# Altium PCB PCB1.PcbDoc
Units mil, origin at the board's own origin, x right, y up, seen from the top; angles counter-clockwise.
Board outline 3500 x 2000 mil, 2 copper layers (Top Layer, Bottom Layer), stack 61.756 mil thick; 34 components, 21 nets, 87 pads, 17 vias.
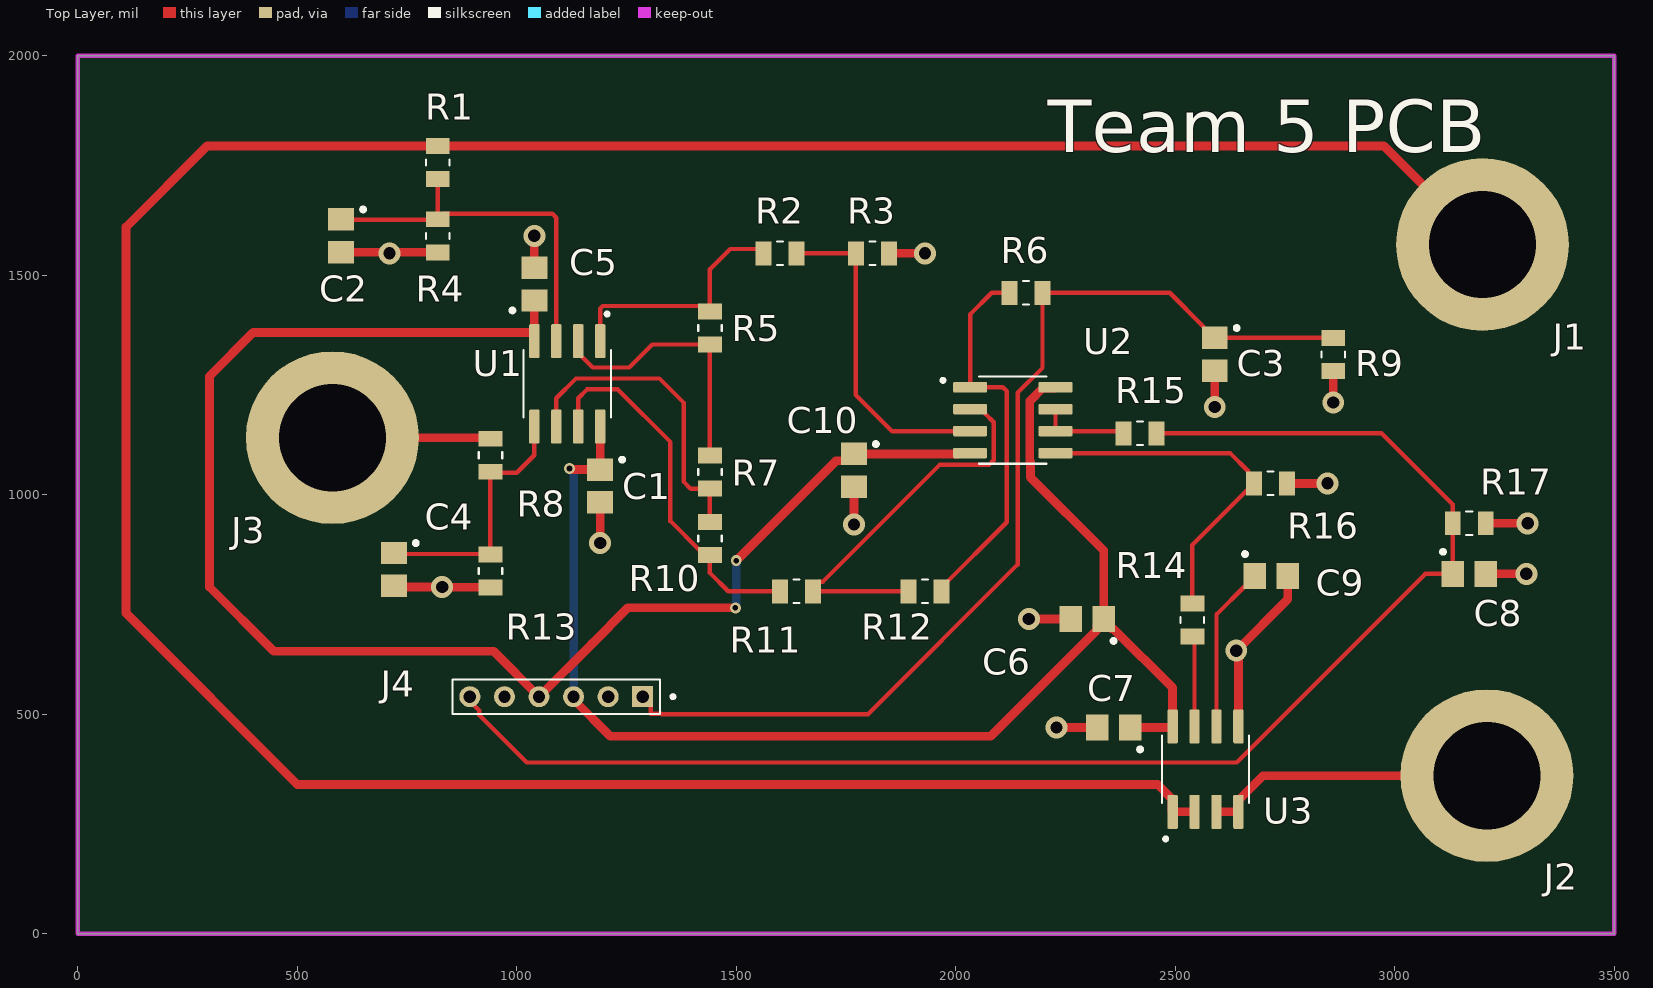
[diagram p0: Top Layer view]
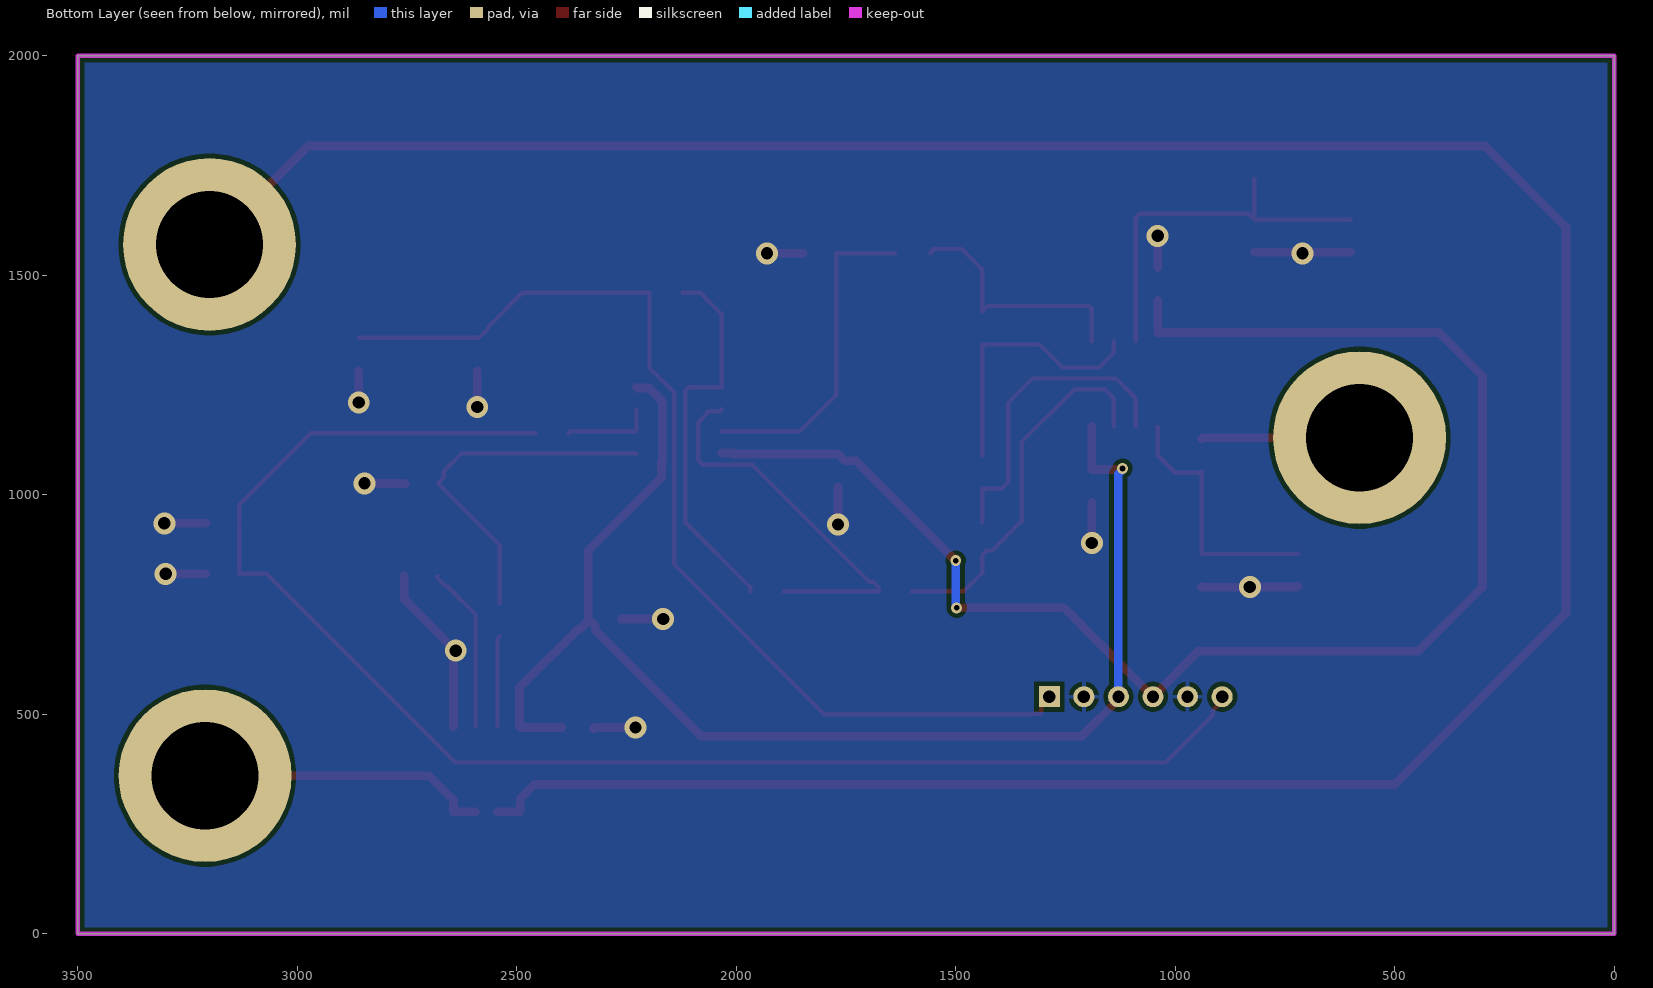
[diagram p1: Bottom Layer view, seen from below]

## Layer stack, top to bottom
Top Solder: solder mask 1, SM-001, Dk 4
Top Layer: signal copper 1.378
Dielectric 1: core 59, Core-043, Dk 4.3
Bottom Layer: signal copper 1.378
Bottom Solder: solder mask 1, SM-001, Dk 4

## Board outline
0,0 3500,0 3500,2000 0,2000

## Design rules (kind name [scope] priority, off if disabled: settings)
BoardOutlineClearance [All] p1: gap=10 ignorepadtopadclearanceinfootprint=FALSE except(0: Arc-SplitContinuation Track-SplitContinuation SMDPad-SplitContinuation THPad-SplitContinuation Via-SplitContinuation Fill-SplitContinuation Poly-SplitContinuation Region-SplitContinuation Text-SplitContinuation)
Clearance [All] p1: gap=10 ignorepadtopadclearanceinfootprint=FALSE
HoleSize [All] p1: absolutevalues=TRUE maxlimit=248.03 minlimit=7.87 maxpercent=80.000 minpercent=20.000
PlaneClearance [All] p1: clearance=10
PlaneConnect [All] p1: planeconnectstyle=Direct reliefexpansion=20 reliefentries=4 reliefconductorwidth=10 reliefairgap=10
PolygonConnect [All] p1: thpad.connectstyle=Relief thpad.reliefconductorwidth=10 thpad.reliefentries=4 thpad.polygonreliefangle="90 Angle" thpad.airgapwidth=10 smdpad.connectstyle=Direct smdpad.reliefconductorwidth=10 smdpad.reliefentries=4 smdpad.polygonreliefangle="90 Angle" smdpad.airgapwidth=10 via.connectstyle=Direct via.reliefconductorwidth=10 via.reliefentries=4 via.polygonreliefangle="90 Angle" via.airgapwidth=10
RoutingVias [All] p1: holewidth=13 width=25 viastyle="Through Hole" minholewidth=13 minwidth=25 maxholewidth=60 maxwidth=80
SolderMaskExpansion [All] p1: expansion=4 istentingtop=FALSE
UnRoutedNet [All] p1: checkbadconnections=TRUE
Width "Schematic Width Constraint_10" [InNet('GND_IN')] p1: maxlimit=100 minlimit=20 preferedwidth=20 minimp=50.000000 maximp=50.000000 favimp=50.000000
Width "Schematic Width Constraint_9" [InNet('V_POS2')] p2: maxlimit=100 minlimit=20 preferedwidth=20 minimp=50.000000 maximp=50.000000 favimp=50.000000
Width "Schematic Width Constraint_8" [InNet('+V')] p3: maxlimit=100 minlimit=20 preferedwidth=20 minimp=50.000000 maximp=50.000000 favimp=50.000000
Width "Schematic Width Constraint_7" [InNet('-V')] p4: maxlimit=100 minlimit=20 preferedwidth=20 minimp=50.000000 maximp=50.000000 favimp=50.000000
Width "Schematic Width Constraint_6" [InNet('V_NEG')] p5: maxlimit=100 minlimit=20 preferedwidth=20 minimp=50.000000 maximp=50.000000 favimp=50.000000
Width "Schematic Width Constraint" [InNet('V_POS')] p6: maxlimit=100 minlimit=20 preferedwidth=20 minimp=50.000000 maximp=50.000000 favimp=50.000000
Width [All] p7: maxlimit=100 minlimit=6 preferedwidth=6
26 further rules are at their usual default settings.

## Classes and differential pairs
component class schematic: C1 C2 C3 C4 C5 C6 C7 C8 C9 C10 J1 J2 J4 R1 R2 R3 R4 R5 R6 R7 R9 R10 R11 R12 R13 R14 R15 R16 R17 U1 U2 U3

## Components (designator, comment, footprint, x,y, rotation, side; value= is the part's Value field where it differs from the comment)
C1 "0.1 µF" C0805 1190,1020 r270 top
C2 "2.2 µF" C0805 600,1590 r270 top
C3 "2.2 µF" C0805 2590,1320 r270 top
C4 "2.2 µF" C0805 720,830 r270 top
C5 "0.1 µF" C0805 1040,1480 r90 top
C6 "0.1 µF" C0805 2299.6,717 r180 top
C7 "0.1 µF" C0805 2360,470 r180 top
C8 "2.2 µF" C0805 3170,820 r0 top
C9 "1.5 µF" C0805 2719,815 r0 top
C10 "0.1 µF" C0805 1768,1055.6 r270 top
J1 "380-10-101-00-002000" "CON1 - 7466005R" 3200,1570 r270 top
J2 "380-10-101-00-002000" "CON1 - 7466005R" 3210,360 r0 top
J3 "380-10-101-00-002000" "CON1 - 7466005R" 580,1130 r270 top
J4 "CON6 - 830-10-006-10-005000" "MILL-MAX_830-10-006-10-005000 - DUPLICATE" 1090,540 r180 top
R1 "40 kΩ" R0805 820,1757.2 r90 top
R2 "1 kΩ" R0805 1600,1550 r0 top
R3 "1 kΩ" R0805 1810,1550 r0 top
R4 "3.75 kΩ" R0805 820,1590 r90 top
R5 "1 kΩ" R0805 1440,1380 r90 top
R6 "1 kΩ" R0805 2160,1460 r0 top
R7 "2 kΩ" R0805 1440,1051.59 r270 top
R8 "40 kΩ" R0805 940,1090 r270 top
R9 "1 kΩ" R0805 2860,1320 r270 top
R10 "1 kΩ" R0805 1440,900 r270 top
R11 "1 kΩ" R0805 1637.6,780 r0 top
R12 "1 kΩ" R0805 1930,780 r0 top
R13 "3.75 kΩ" R0805 940,826.81 r270 top
R14 "1 kΩ" R0805 2539,715 r90 top
R15 "1 kΩ" R0805 2420,1140 r0 top
R16 "1 kΩ" R0805 2717,1026 r0 top
R17 "0 Ω" R0805 3169.81,935 r0 top
U1 "OPA2836IDR" "SOIC8 - SOIC127P599X175-8N" 1115,1252.76 r270 top
U2 "OPA2836IDR" "SOIC8 - SOIC127P599X175-8N" 2130,1170 r0 top
U3 "MCS1801GS-12-Z" "SOIC8 - SOIC127P599X175-8N" 2569,375 r90 top

## Footprints (in the part's own frame and the unit in brackets; to place one, negate y for a bottom-side part, rotate by r counter-clockwise, add the part's x,y. Pads: shape width x height; smd on the part's side, far side on the other; paste and mask are expansions set on the pad)
C0805 [mm]
  rect 1.3x1.5 smd: 1(-0.95,0) 2(0.95,0)
  silkscreen extent -1.62,1.17 -1.43,1.37
"CON1 - 7466005R" [mm]
  round 10 hole 6.2: 1(0,0)
"MILL-MAX_830-10-006-10-005000 - DUPLICATE" [mm]
  rect 1.218x1.218 hole 0.71: 1(-5,0)
  round 1.218 hole 0.71: 2(-3,0) 3(-1,0) 4(1,0) 5(3,0) 6(5,0)
  silkscreen extent -6.85,-1 6,1, body extent -6,-1 6,1, height 6.86
R0805 [mm]
  rect 0.92x1.38 smd: 1(-0.955,0) 2(0.955,0)
  silkscreen extent -0.17,-0.68 0.17,0.68
"SOIC8 - SOIC127P599X175-8N" [mm]
  rrect25% 1.97x0.6 smd: 1(-2.47,1.905) 2(-2.47,0.635) 3(-2.47,-0.635) 4(-2.47,-1.905) 5(2.47,-1.905) 6(2.47,-0.635) 7(2.47,0.635) 8(2.47,1.905)
  silkscreen extent -4.14,-2.52 1.95,2.52, body extent -3,-2.45 3,2.45, height 1.75

## Part data
C1 C2 C3 C4 C5 C6 C7 C8 C9 C10: library part Unkown_Capacitor, "SMD Capacitor"
J1 J2 J3: library part "CONN_BUSH - 380-10-101-00-002000", "No Description Available", Mfr_Name=Mill-Max, Copyright="Copyright (C) 2022 Ultra Librarian. All rights reserved.", Digi-Key_Part_Number_1=ED10251-ND, Manufacturer_Part_Number=380-10-101-00-002000, RefDes=RefDes, Type=DEV
J4: "6 Position Header Connector Solder Cup Gold", Package=None, Availability="In Stock", Check_prices=https://www.snapeda.com/parts/830-10-006-10-005000/Mill-Max%20Manufacturing%20Corp./view-part/6308393/?ref=eda, MF="Mill-Max Manufacturing Corp.", MP=830-10-006-10-005000, Price=None, Purchase-URL=https://pricing.snapeda.com/search/part/830-10-006-10-005000/?ref=eda, SnapEDA_Link=https://www.snapeda.com/parts/830-10-006-10-005000/Mill-Max%20Manufacturing%20Corp./view-part/6308393/?ref=snap
R1 R2 R3 R4 R5 R6 R7 R8 R9 R10 R11 R12 R13 R14 R15 R16 R17: library part Unknown_Resistor, "SMD Resistor"
U1 U2: "Dual, Very Low Power, Rail to Rail out, Negative Rail in, VFB Op Amp 8-SOIC -40 to 125", Case/Package=D, Input Bias Current=1uA, Input Offset Voltage (Vos)=65uV, Manufacturer="Texas Instruments", Max Dual Supply Voltage=2.75V, Max I/O Voltage=400uV, Max Operating Temperature=125°C, Max Supply Voltage=5.5V, Min Dual Supply Voltage=1.25V, Min Operating Temperature=-40°C, Min Supply Voltage=2.5V, Operating Supply Current=1mA, Output Current per Channel=50mA, Package Quantity=2500, Power Supply Rejection Ratio (PSRR)=94dB, Supplier Part Number 1=296-OPA2836IDRCT-ND, Voltage Gain=122dB, -3db Bandwidth=205MHz, Category="Amplifiers - Op Amps, Buffer, Instrumentation", Common Mode Rejection Ratio=94dB, ComponentLink1Description="Data Sheet", ComponentLink1URL=https://datasheet.ciiva.com/14461/opa2836-14461366.pdf?src-supplier=Avnet, ComponentLink2Description="Data Sheet", ComponentLink2URL=https://datasheet.ciiva.com/1815/opa2836-1815388.pdf?src-supplier=Digi-Key, Contact Plating=Gold, Gain Bandwidth Product=118MHz, Lead Free="Lead Free", Manufacturer Part Number=OPA2836IDR, Number of Channels=2, Number of Circuits=2, Number of Elements=2, Number of Pins=8, Packaging="Tape and Reel", Pricing 1="1=4.26000, 10=3.83000, 25=3.62040, 100=3.13770, 250=2.97680, 500=2.67108, 1000=2.42880 (USD)", Radiation Hardening=No, RoHS=Yes, RoHS Compliant=Yes, Series=OPA2836, Settling Time=30ns, Slew Rate=560V/µs, Stock 1=4615, Supplier 1=Digi-Key, Unity Gain Bandwidth Product=118MHz
U3: library part MCS1801GS-12-Z_1, "No Description Available", Mfr_Name="Monolithic Power Systems", Copyright="Copyright (C) 2022 Ultra Librarian. All rights reserved.", Digi-Key_Part_Number_1=1589-MCS1801GS-12-ZTR-ND, Digi-Key_Part_Number_2=1589-MCS1801GS-12-ZCT-ND, Digi-Key_Part_Number_3=1589-MCS1801GS-12-ZDKR-ND, Manufacturer_Part_Number=MCS1801GS-12-Z, RefDes=RefDes, Type=DEV

## Via types
v1: diameter 50, hole 28, Top Layer to Bottom Layer, 14 vias
v2: diameter 25, hole 13, Top Layer to Bottom Layer, 3 vias

## Nets (pads, with @x,y where several pads share a name; then routed paths per layer and width w, separated by ;. In a path a pad name is that pad's centre, name@x,y a point inside that pad or via, vN(x,y) a via of type N, cw(c..) or ccw(c..) an arc to the next point about the centre after c; other vN are vias at no path point)
+V: C1.1 C6.1 C7.1 J4.3 U1.8 U2.8 U3.8 | length 3106.4
  Top Layer w20: v2(1120,1060) 1122.71,1060 1125.3,1057.4 C1.1 U1.8 ; J4.3 1129.37,533.51 1212.88,450 2080,450 2321.41,691.41 2321.41,701.41 C6.1 ; U2.8 2225.43,1243.19 2198.29,1243.19 2168.46,1213.37 2168.46,1076.63 2170,1075.1 2170,1040 2337,873 C6.1 ; C7.1 2491.76,470 U3.8 2494,560 2359.03,694.97 2355.09,694.97 2337,713.06 C6.1
  Bottom Layer w20: v2(1120,1060) 1120,1057.29 1130,1047.29 1130,540.63 J4.3
-V: C5.1 C10.1 J4.4 U1.4 U2.4 | length 3464.5
  Top Layer w20: C5.1 1040,1368.19 1038.19,1370 400,1370 300,1270 300,790 446.67,643.33 947.3,643.33 J4.4 1171.6,660.97 1253.08,742.45 v2(1497.8,742.45) ; v2(1500,850) 1727.41,1077.41 1752.41,1077.41 C10.1 2003.79,1093 2005.79,1095 U2.4
  Bottom Layer w20: v2(1497.8,742.45) 1498.76,743.41 1498.76,746.94 1500,748.18 v2(1500,850)
GND_IN: C1.2 C2.2 C3.2 C4.2 C5.2 C6.2 C7.2 C8.2 C9.2 C10.2 J4.2 J4.5 R3.2 R4.1 R9.2 R13.2 R16.2 R17.2 U3.5 | length 1800.5
  Top Layer w20: C2.2 707.4,1552.6 v1(710,1550) 712.4,1552.4 R4.1 ; C4.2 722.6,790 v1(830,790) 830.79,789.21 R13.2 ; R13.2@938.41,791.59 R13.2@940,790 ; C5.2 v1(1040,1590) ; v1(1190,890) C1.2 ; v1(1768,932.41) C10.2 ; R3.2 v1(1930,1550) ; v1(2166.47,717) C6.2 ; v1(2229.47,470) C7.2 C7.2@2325.2,467.4 ; v1(2590,1200) C3.2 ; v1(2639,645) 2644,640 U3.5 ; v1@2639.53,645 2756.4,761.87 C9.2 ; R16.2 v1(2847,1026) ; v1(2860,1210) R9.2 ; C8.2 v1(3300,820) ; R17.2 v1(3303,935)
I_Sensor: C8.1 J4.6 R15.2 R17.1 | length 3384.5
  Top Layer w10: J4.6 893.15,529.73 914.34,508.54 914.34,498.18 1022.52,390 2640,390 3070,820 C8.1 R17.1@3132.6,928.11 ; R15.2 2970,1140 3132.21,977.79 R17.1
NetC2_1: C2.1 R1.1 R4.2 U1.3 | length 872.9
  Top Layer w10: C2.1 600,1626.81 819.21,1626.81 R4.2 ; R1.1 R4.2 ; U1.3 1090,1631.21 1081.21,1640 832.4,1640 R4.2
NetC4_1: C4.1 R8.2 R13.1 U1.5 | length 590.1
  Top Layer w10: C4.1@720,866.81 721.59,865.22 R13.1@938.41,865.22 ; R13.1 R8.2 942.4,1050 1000,1050 1040,1090 U1.5
NetC9_1: C9.1 U3.6 | length 381.3
  Top Layer w10: U3.6 2594,727.4 2659.57,792.97 2663.51,792.97 2681.6,811.06 C9.1
NetR2_1: R2.1 R5.2 U1.1 | length 574
  Top Layer w10: U1.1 1190,1424.14 1195.86,1430 1426.81,1430 R5.2@1440,1416.81 ; R5.2 1440,1513.94 1486.06,1560 R2.1@1552.4,1560 ; R2.1@1547.79,1560 R2.1@1557.79,1550
NetR2_2: R2.2 R3.1 U2.3 | length 751.8
  Top Layer w10: R2.2 1704.02,1550 1705,1550 R3.1 1772.4,1227.6 1855,1145 U2.3
NetR5_1: R5.1 R7.1 U1.2 | length 615.6
  Top Layer w10: U1.2 1140,1323.03 1173.03,1290 1256.39,1290 1308.79,1342.4 R5.1 R7.1
NetR6_1: R6.1 R12.2 U2.1 | length 880.4
  Top Layer w10: R12.2 1967.6,789.06 2115.96,937.42 2115.96,1236.21 2107.18,1245 U2.1 2032.76,1410.96 2081.79,1460 R6.1
NetR7_2: R7.2 R10.1 U1.6 | length 718.9
  Top Layer w10: U1.6 1090,1220 1135,1265 1325,1265 1380,1210 1380,1030 1396,1014 R7.2 R10.1
NetR10_2: R10.2 R11.1 U1.7 | length 852.5
  Top Layer w10: U1.7 1140,1220 1160,1240 1230,1240 1350,1120 1350,940 1416.99,873.01 1429.39,873.01 R10.2 1440,821.79 1481.79,780 R11.1
NetR11_2: R11.2 R12.1 U2.2 | length 911.9
  Top Layer w10: R12.1 R11.2 1675.2,789.06 1688.31,802.17 1697.36,802.17 1963.2,1068 2075.83,1068 2086.54,1078.71 2086.54,1165.04 2066.54,1185.04 2066.54,1188.19 2064.04,1190.69 2037.07,1190.69 U2.2
NetR14_1: R14.1 U3.7 | length 207.2
  Top Layer w10: R14.1 2544,672.4 U3.7
NetR14_2: R14.2 R16.1 U2.5 | length 820.8
  Top Layer w10: U2.5 2625,1095 2666.29,1053.71 2666.29,1039.11 R16.1 2539,885.6 R14.2
NetR15_1: R15.1 U2.6 U2.7 | length 207.2
  Top Layer w10: U2.7 U2.6 2377.4,1145 R15.1
V_NEG: J3.1 R8.1 | length 361
  Top Layer w20: J3.1 937.6,1130 R8.1
V_POS: J1.1 R1.2 U3.1 U3.2 | length 6777.5
  Top Layer w20: U3.2 U3.1 2492.19,279.57 2492.19,307.81 2460,340 500,340 110,730 110,1610 294.8,1794.8 R1.2 2975.2,1794.8 J1.1
V_POS2: J2.1 U3.3 U3.4 | length 665.9
  Top Layer w20: U3.3 U3.4 2644,304.72 2645.81,306.54 2646.54,306.54 2700,360 J2.1
V_Sensor: C3.1 J4.1 R6.2 R9.1 | length 2373.8
  Top Layer w10: J4.1 1305.2,521.65 1305.2,501.02 1329.17,501.02 1330.2,500 1800,500 2140.96,840.96 2140.96,1232.33 2197.6,1288.96 R6.2 2487.4,1460 2565.47,1381.93 2565.47,1377.99 2586.06,1357.4 C3.1 2590.2,1357.6 R9.1

## Polygon pours and split planes (outlines as drawn)
GND_IN on Bottom Layer "GND_IN_L02_P000" (solid, pour order 0): 0,2000 3500,2000 3500,0 0,0

## Keep-outs
Keep-Out Layer:
  the board outline again, w10

## Silkscreen, mask and mechanical layers (free items; w line width, h text height)
Top Overlay:
  text "Team 5 PCB" at 2210,1780 h120